# Altium PCB wrist_V3.PcbDoc
Units mm, origin at the board's own origin, x right, y up, seen from the top; angles counter-clockwise.
Board outline 79.47 x 23.4 mm, 2 copper layers (Top Layer, Bottom Layer); 47 components, 42 nets, 260 pads, 472 vias.
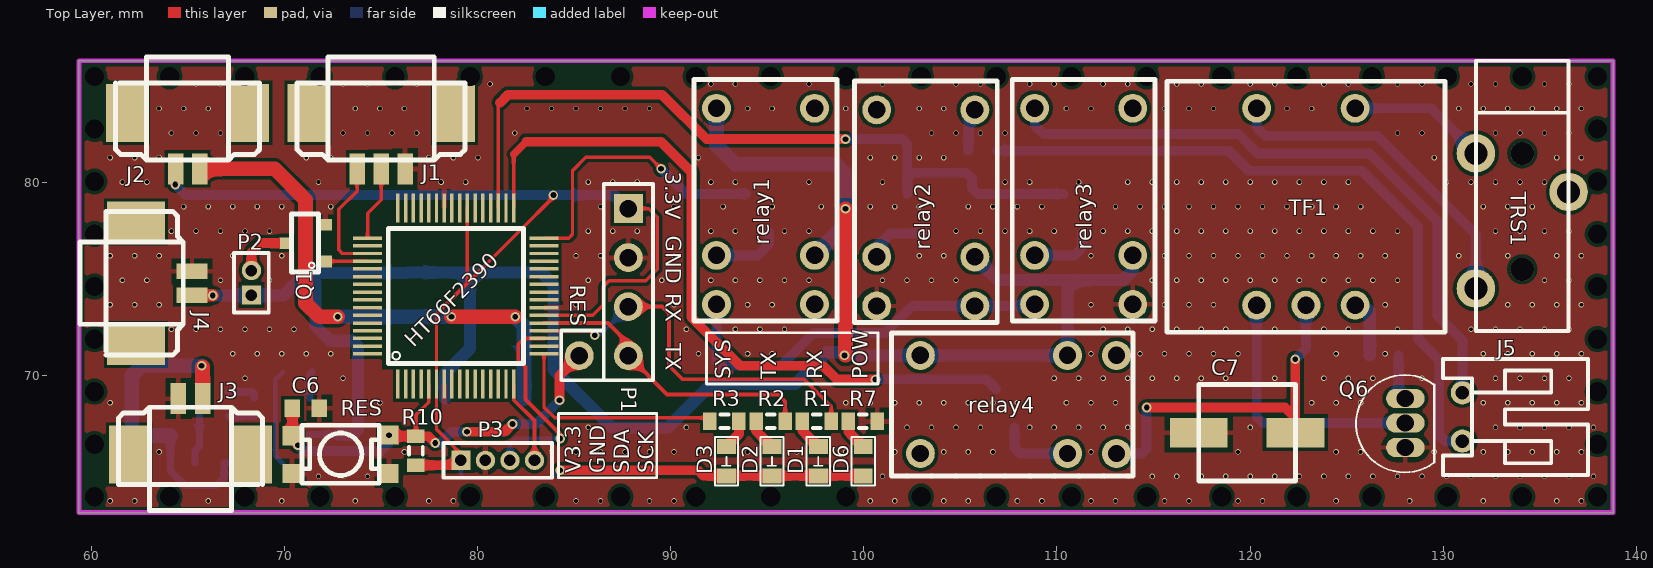
[diagram p0: Top Layer view]
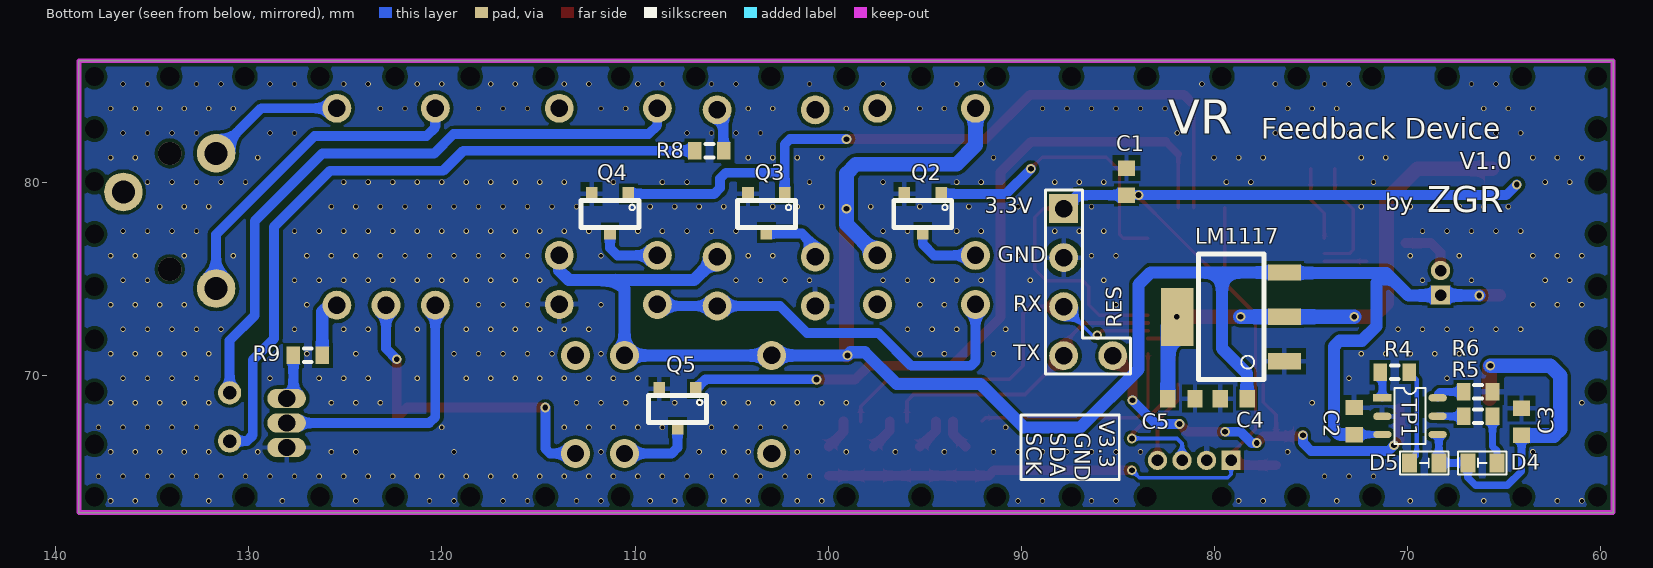
[diagram p1: Bottom Layer view, seen from below]

## Layer stack, top to bottom
Top Solder: solder mask 0.0102, Solder Resist, Dk 3.5
Top Layer: signal copper 0.0356
Dielectric 1: dielectric 0.32, FR-4, Dk 4.8
Bottom Layer: signal copper 0.0356
Bottom Solder: solder mask 0.0102, Solder Resist, Dk 3.5

## Board outline
59.34,62.892 138.81,62.892 138.81,86.295 59.34,86.295

## Design rules (kind name [scope] priority, off if disabled: settings)
Clearance [All] p1: gap=0.178 ignorepadtopadclearanceinfootprint=FALSE
ComponentClearance [All] p1: gap=0.254 collisioncheckmode=3 verticalgap=2540 showdistances=FALSE
PolygonConnect [All] p1: connectstyle=Relief reliefconductorwidth=0.254 reliefentries=4 polygonreliefangle="90 Angle" airgapwidth=0.254
RoutingVias [All] p1: holewidth=0.711 width=1.27 viastyle="Through Hole" minholewidth=0.2 minwidth=0.225 maxholewidth=1.2 maxwidth=1.27
SilkToSilkClearance [All] p1: silktosilkclearance=0.1
SolderMaskExpansion [All] p1: expansion=0.102
Width [All] p1: maxlimit=1.016 minlimit=0.178 preferedwidth=0.254 minimp=50.000000 maximp=50.000000 favimp=50.000000
28 further rules are at their usual default settings.

## Components (designator, comment, footprint, x,y, rotation, side; value= is the part's Value field where it differs from the comment)
C1 "Cap Semi" 1608[0603] 84.547,80.036 r270 bottom value=0.1uf
C2 "Cap Semi" 1608[0603] 72.747,67.636 r270 bottom value=1uf
C3 "Cap Semi" 1608[0603] 64.09,67.59 r270 bottom value=10uF
C4 "Cap Semi" 1608[0603] 79,68.8 r180 bottom value=10uf
C5 "Cap Semi" 1608[0603] 81.7,68.8 r0 bottom value=10uf
C6 "Cap Semi" 1608[0603] 71.1,68.3 r180 top value=0.1uf
C7 "22uf/25v" CAP_22UF_25V_5*5.4mm_SMD 122.347,64.536 r180 top
D1 "LED" SMD-0603_LED 97.64,64.8 r90 top
D2 "LED" SMD-0603_LED 95.24,64.8 r90 top
D3 "LED" SMD-0603_LED 92.88,64.8 r90 top
D4 "GREEN" SMD-0603_LED 66.87,65.465 r180 bottom
D5 "RED" SMD-0603_LED 68.372,65.465 r0 bottom
D6 "LED" SMD-0603 99.97,64.8 r90 top
HT66F2390 "HT66F2390_64" HLQFP-64(7mm*7mm) 75.865,69.543 r90 top (schematic designator HT66F2390_64_1)
J1 "Head_3" Terminal_block_3pin_1.25mm_SMD 74.4,83.6 r0 top
J2 "Head_2" Terminal_block_2pin_1.25mm_SMD 65,83.6 r0 top
J3 "Head_2" Terminal_block_2pin_1.25mm_SMD 65.1,65.9 r180 top
J4 "Head_2" Terminal_block_2pin_1.25mm_SMD 62.3,74.799 r90 top
J5 "JST_2P" JST_2P_S_2.5mm 137.5,70.85 r270 top
LM1117 "LM1117" SOT-223 80.818,69.783 r90 bottom
P1 "Header 4" HDR1X4 87.8,78.64 r270 top
P2 "MHDR1X2" MHDR1X2 68.28,75.43 r270 top
P3 "MHDR1X4" MHDR1X4 82.94,65.6 r180 top
Q1 "Transistor" SOT-23 70.1,76.85 r90 top
Q2 "Transistor" SOT-23 95.1,77.4 r0 bottom
Q3 "Transistor" SOT-23 103.2,77.4 r0 bottom
Q4 "Transistor" SOT-23 111.3,77.4 r0 bottom
Q5 "Transistor" SOT-23 107.8,67.3 r0 bottom
Q6 "C1815" TO-92A 128.047,68.806 r0 top
R1 "Res3" J1-0603 97.56,67.62 r0 top value=330
R2 "Res3" J1-0603 95.17,67.62 r0 top value=330
R3 "Res3" J1-0603 92.78,67.62 r180 top value=330
R4 "Res3" J1-0603 70.658,70.164 r0 bottom value=330
R5 "Res3" J1-0603 66.34,67.878 r180 bottom value=330
R6 "Res3" J1-0603 66.34,69.148 r0 bottom value=1.66K
R7 "Res3" J1-0603 99.95,67.62 r0 top value=330
R8 "Res3" J1-0603 106.147,81.636 r180 bottom value=0
R9 "Res3" J1-0603 126.947,71.036 r180 bottom value=33k
R10 "Res3" J1-0603 76.8,66.1 r90 top value=1K
relay1 "SY-05-K" SY-05-K 91.217,72.826 r90 top
relay2 "SY-05-K" SY-05-K 99.517,72.746 r90 top
relay3 "SY-05-K" SY-05-K 107.697,72.826 r90 top
relay4 "SY-05-K" SY-05-K 113.937,64.806 r180 top
RES "SW_Button" "TACK-SW_SMD 2P 4x3mm_2" 74.9,67.416 r270 top (schematic designator SB1)
TF1 "TF_CT" TF_14.4*13mm 115.697,72.236 r90 top
TP1 "" SOT-23-6 70.663,69.348 r180 bottom (schematic designator TP-4057)
TRS1 "TRS_3pin" PJ-320B_Dip 136.5,83.6 r270 top

## Footprints (in the part's own frame and the unit in brackets; to place one, negate y for a bottom-side part, rotate by r counter-clockwise, add the part's x,y. Pads: shape width x height; smd on the part's side, far side on the other; paste and mask are expansions set on the pad)
1608[0603] [mm] "Chip Capacitor, Body 1.6x0.8mm, IPC High Density"
  rect 0.8x0.9 smd: 1(-0.7,0) 2(0.7,0)
  body extent -0.87,-0.48 0.87,0.48, height 1.3
CAP_22UF_25V_5*5.4mm_SMD [mm]
  rect 3x1.524 smd: 1(0,-2.5) 2(5,-2.5)
  silkscreen extent 0,-5 5,0
HDR1X4 [mm] "Connector; Header; 4 Position"
  rect 1.5x1.5 hole 0.9: 1(0,0)
  round 1.5 hole 0.9: 2(2.54,0) 3(5.08,0) 4(7.62,0)
  silkscreen extent -1.27,-1.27 8.89,1.27
HLQFP-64(7mm*7mm) [mm] "HLQFP64(7mm*7mm)"
  rect 1.5x0.18 smd: 1(0,0) 2(0,-0.4) 3(0,-0.8) 4(0,-1.2) 5(0,-1.6) 6(0,-2) 7(0,-2.4) 8(0,-2.8) 9(0,-3.2) 10(0,-3.6) 11(0,-4) 12(0,-4.4) 13(0,-4.8) 14(0,-5.2) 15(0,-5.6) 16(0,-6) 33(9.13,-6) 34(9.13,-5.6) 35(9.13,-5.2) 36(9.13,-4.8) 37(9.13,-4.4) 38(9.13,-4) 39(9.13,-3.6) 40(9.13,-3.2) 41(9.13,-2.8) 42(9.13,-2.4) 43(9.13,-2) 44(9.13,-1.6) 45(9.13,-1.2) 46(9.13,-0.8) 47(9.13,-0.4) 48(9.13,0)
  rect 0.18x1.5 smd: 17(1.57,-7.57) 18(1.97,-7.57) 19(2.37,-7.57) 20(2.77,-7.57) 21(3.17,-7.57) 22(3.57,-7.57) 23(3.97,-7.57) 24(4.37,-7.57) 25(4.77,-7.57) 26(5.17,-7.57) 27(5.57,-7.57) 28(5.97,-7.57) 29(6.37,-7.57) 30(6.77,-7.57) 31(7.17,-7.57) 32(7.57,-7.57) 49(7.57,1.57) 50(7.17,1.57) 51(6.77,1.57) 52(6.37,1.57) 53(5.97,1.57) 54(5.57,1.57) 55(5.17,1.57) 56(4.77,1.57) 57(4.37,1.57) 58(3.97,1.57) 59(3.57,1.57) 60(3.17,1.57) 61(2.77,1.57) 62(2.37,1.57) 63(1.97,1.57) 64(1.57,1.57)
  silkscreen extent 1.07,-6.5 8.07,0.5
J1-0603 [mm] "Chip Resistor, Body 1.6x0.8mm, IPC High Density"
  rect 0.7x0.9 smd: 1(-0.75,0) 2(0.75,0)
  silkscreen extent -0.2,-0.35 0.2,0.35, body extent -0.85,-0.48 0.85,0.48, height 0.9
JST_2P_S_2.5mm [mm]
  round 1.2 hole 0.7: 1(1.75,-6.5) 2(4.25,-6.5)
  silkscreen extent 0,-7.5 6,0
MHDR1X2 [mm] "Connector; Header; 2 Position"
  round 1 hole 0.6: 1(0,0)
  rect 1x1 hole 0.6: 2(1.27,0)
  silkscreen extent -0.9,-0.9 2.17,0.9
MHDR1X4 [mm] "Connector; Header; 4 Position"
  round 1 hole 0.6: 1(0,0) 2(1.27,0) 3(2.54,0)
  rect 1x1 hole 0.6: 4(3.81,0)
  silkscreen extent -0.9,-0.9 4.71,0.9
PJ-320B_Dip [mm]
  round 2 hole 1.2: 1(2.1,-4.8) 2(9.1,-4.8) 3(4.1,0)
  silkscreen extent -2.7,-4.8 11.3,0
SMD-0603 [mm]
  rect 0.78x0.98 smd: 1(0,0) 2(1.51,0)
  silkscreen extent -0.5,-0.6 2,0.6
SMD-0603_LED [mm]
  rect 0.78x0.98 smd: 1(0,0) 2(1.51,0)
  silkscreen extent -0.5,-0.6 2,0.6
SOT-23 [mm]
  rect 0.6x0.7 smd: 1(-0.95,-2) 2(0,0) 3(0.95,-2)
  silkscreen extent -1.5,-1.65 1.5,-0.25
SOT-23-6 [mm]
  rect 0.95x0.38 smd: 1(-0.63,-0.51)
  oval 0.95x0.38 smd: 2(-0.63,-1.47) 3(-0.63,-2.41) 4(2.23,-2.41) 5(2.227,-1.461) 6(2.23,-0.51)
  silkscreen extent 0,-2.91 1.61,0
SOT-223 [mm]
  rect 0.84x1.7 smd: 1(0.95,-4.45) 2(3.25,-4.45) 3(5.55,-4.45)
  rect 3x1.7 smd: 2(3.25,1.1)
  silkscreen extent 0,-3.4 6.5,0
SY-05-K [mm]
  round 1.5 hole 0.9: 1(0.85,-6.23) 2(3.39,-6.23) 5(11.01,-6.23) 6(11.01,-1.15) 9(3.39,-1.15) 10(0.85,-1.15)
  silkscreen extent 0,-7.39 12.5,0.01
"TACK-SW_SMD 2P 4x3mm_2" [mm]
  rect 1x1 smd: 1(0.5,0.5) 1(0.55,-4.5) 2(2.5,0.5) 2(2.5,-4.5)
  silkscreen extent 0,-4 3,0
Terminal_block_2pin_1.25mm_SMD [mm]
  rect 0.8x1.6 smd: 1(-0.65,-2.9) 2(0.6,-2.9)
  rect 2.1x3 smd: ""(-3.2,0) ""(3.15,0)
  silkscreen extent -3.75,-2.45 3.7,2.9
Terminal_block_3pin_1.25mm_SMD [mm]
  rect 0.8x1.6 smd: 1(-0.65,-2.9) 2(0.6,-2.9) 3(1.85,-2.9)
  rect 2.1x3 smd: ""(-3.2,0) ""(4.4,0)
  silkscreen extent -3.75,-2.45 4.95,2.9
TF_14.4*13mm [mm]
  round 1.5 hole 0.9: 1(1.4,-4.65) 2(1.4,-7.2) 3(1.4,-9.75) 4(11.6,-4.65) 5(11.6,-9.75)
  silkscreen extent 0,-14.4 13,0
TO-92A [mm]
  oval 2x1 hole 0.9: 1(0,0) 2(0,-1.27) 3(0,-2.54)
  silkscreen extent -2.55,-3.83 1.5,1.22

## Part data
C1 C2 C3 C4 C5 C6: "Capacitor (Semiconductor SIM Model)", LatestRevisionDate=29-May-2009, LatestRevisionNote="IPC-7351 Footprint Added.", PackageDescription="Chip Capacitor", PackageReference=C1206, Published=8-Jun-2000, Publisher="Altium Limited"
C7: library part Cap
D4 D5: library part LED
P1 P3: "Header, 4-Pin", LatestRevisionDate=17-Jul-2002, LatestRevisionNote="Re-released for DXP Platform.", Publisher="Altium Limited"
P2: "Header, 2-Pin", LatestRevisionDate=17-Jul-2002, LatestRevisionNote="Re-released for DXP Platform.", Publisher="Altium Limited"
Q6: library part Transistor
R1 R2 R3 R4 R5 R6 R7 R8 R9 R10: "Resistor", LatestRevisionDate=29-May-2009, LatestRevisionNote="IPC-7351 Footprint Added.", PackageDescription="Chip Resistor", PackageReference=J1-0603, Published=8-Jun-2000, Publisher="Altium Limited"
TF1: library part Trans_CT
TP1: library part TP-4057

## Free pads (board coordinates)
  round 0 hole 1: 0(60.15,63.72) 0(60.15,66.44) 0(60.15,69.16) 0(60.15,71.88) 0(60.15,74.6) 0(60.15,77.32) 0(60.15,80.04) 0(60.15,82.76) 0(60.15,85.48) 0(64.042,63.72) 0(64.042,85.48) 0(67.935,63.72) 0(67.935,85.48) 0(71.827,63.72) 0(71.827,85.48) 0(75.72,63.72) 0(75.72,85.48) 0(79.612,63.72) 0(79.612,85.48) 0(83.505,63.72) 0(83.505,85.48) 0(87.397,63.72) 0(87.397,85.48) 0(91.29,63.72) 0(91.29,85.48) 0(95.182,63.72) 0(95.182,85.48) 0(99.075,63.72) 0(99.075,85.48) 0(102.967,63.72) 0(102.967,85.48) 0(106.86,63.72) 0(106.86,85.48) 0(110.752,63.72) 0(110.752,85.48) 0(114.645,63.72) 0(114.645,85.48) 0(118.537,63.72) 0(118.537,85.48) 0(122.43,63.72) 0(122.43,85.48) 0(126.322,63.72) 0(126.322,85.48) 0(130.215,63.72) 0(130.215,85.48) 0(134.107,63.72) 0(134.107,85.48) 0(138,63.72) 0(138,85.48) 0(138,66.44) 0(138,69.16) 0(138,71.88) 0(138,74.6) 0(138,77.32) 0(138,80.04) 0(138,82.76)
  round 1.5 hole 0.9: ""(85.26,71.02)

## Via types
v1: diameter 0.275, hole 0.2, Top Layer to Bottom Layer, tented both sides, 447 vias
v2: diameter 0.5, hole 0.3, Top Layer to Bottom Layer, tented both sides, 23 vias
v3: diameter 1.2, hole 1.2, Top Layer to Bottom Layer, 2 vias

## Nets (pads, with @x,y where several pads share a name; then routed paths per layer and width w, separated by ;. In a path a pad name is that pad's centre, name@x,y a point inside that pad or via, vN(x,y) a via of type N, cw(c..) or ccw(c..) an arc to the next point about the centre after c; other vN are vias at no path point)
3.3V: C5.2 J2.2 LM1117.2 | length 27.1
  Top Layer w0.762: J2.2 69.48,80.7 71.08,79.1 71.08,73.74 71.787,73.033 v2(72.747,73.033) ; v2(78.637,73.033) v2(81.943,73.033)
  Bottom Layer w0.762: v2(72.747,73.033) 76.368,73.033 v2(78.637,73.033) ; LM1117.2@81.918,73.033 82.4,72.551 C5.2
ESP_EN: HT66F2390.18
ESP_RX: HT66F2390.21 P1.4 R2.2 | length 15.6
  Top Layer w0.203: HT66F2390.21 86.747,72.713 87.8,71.66 P1.4 89.811,69.009 95.571,69.009 95.92,68.66 R2.2
ESP_TX: HT66F2390.20 P1.3 R1.2 | length 20.1
  Top Layer w0.203: HT66F2390.20 85.827,72.313 v2(86.06,72.08) ; P1.3 89.547,73.56 89.9,73.207 89.9,70.5 90.6,69.8 96.89,69.8 98.31,68.38 R1.2
  Bottom Layer w0.203: v2(86.06,72.08) 86.32,72.08 P1.3
GND: C1.1 C2.1 C3.1 C4.1 C5.1 C6.1 C7.2 HT66F2390.7 HT66F2390.23 HT66F2390.42 J1.3 J3.2 J4.2 LM1117.1 P1.2 P3.3 Q1.3 Q2.3 Q3.3 Q4.3 Q5.3 Q6.3 R6.1 R7.2 relay2.10 relay3.1 RES.2 TP1.2
  other v1: 60.96,63.5 62.23,63.5 66.04,63.5 69.85,63.5 73.66,63.5 77.47,63.5 78.74,63.5 85.09,63.5 86.36,63.5 88.9,63.5 90.17,63.5 100.33,63.5 101.6,63.5 104.14,63.5 105.41,63.5 107.95,63.5 109.22,63.5 111.76,63.5 113.03,63.5 115.57,63.5 116.84,63.5 119.38,63.5 120.65,63.5 124.46,63.5 128.27,63.5 132.08,63.5 135.89,63.5 137.16,63.5 71.755,64.77 73.025,64.77 74.295,64.77 100.965,64.77 102.235,64.77 103.505,64.77 104.775,64.77 106.045,64.77 107.315,64.77 108.585,64.77 109.855,64.77 111.125,64.77 112.395,64.77 113.665,64.77 114.935,64.77 116.205,64.77 117.475,64.77 118.745,64.77 120.015,64.77 121.285,64.77 122.555,64.77 123.825,64.77 125.095,64.77 126.365,64.77 127.635,64.77 128.905,64.77 130.175,64.77 131.445,64.77 132.715,64.77 133.985,64.77 135.255,64.77 136.525,64.77 137.795,64.77 63.5,66.04 76.2,66.04 83.82,66.04 85.09,66.04 86.36,66.04 87.63,66.04 88.9,66.04 90.17,66.04 91.44,66.04 93.98,66.04 96.52,66.04 99.06,66.04 101.6,66.04 104.14,66.04 105.41,66.04 106.68,66.04 111.76,66.04 119.38,66.04 124.46,66.04 125.73,66.04 129.54,66.04 132.08,66.04 133.35,66.04 134.62,66.04 135.89,66.04 137.16,66.04 85.725,67.31 90.805,67.31 102.235,67.31 103.505,67.31 104.775,67.31 106.045,67.31 108.585,67.31 109.855,67.31 111.125,67.31 112.395,67.31 113.665,67.31 120.015,67.31 132.715,67.31 133.985,67.31 135.255,67.31 136.525,67.31 137.795,67.31 60.96,68.58 74.93,68.58 99.06,68.58 100.33,68.58 101.6,68.58 102.87,68.58 104.14,68.58 105.41,68.58 106.68,68.58 107.95,68.58 110.49,68.58 111.76,68.58 113.03,68.58 123.19,68.58 124.46,68.58 125.73,68.58 132.08,68.58 133.35,68.58 134.62,68.58 135.89,68.58 137.16,68.58 67.945,69.85 73.025,69.85 109.855,69.85 111.125,69.85 112.395,69.85 113.665,69.85 114.935,69.85 116.205,69.85 117.475,69.85 118.745,69.85 121.285,69.85 123.825,69.85 125.095,69.85 126.365,69.85 128.905,69.85 132.715,69.85 133.985,69.85 135.255,69.85 136.525,69.85 67.31,71.12 68.58,71.12 69.85,71.12 71.12,71.12 72.39,71.12 91.44,71.12 93.98,71.12 95.25,71.12 111.76,71.12 114.3,71.12 115.57,71.12 116.84,71.12 118.11,71.12 119.38,71.12 124.46,71.12 127,71.12 132.08,71.12 133.35,71.12 134.62,71.12 135.89,71.12 137.16,71.12 64.135,72.39 65.405,72.39 66.675,72.39 67.945,72.39 69.215,72.39 70.485,72.39 90.805,72.39 93.345,72.39 94.615,72.39 95.885,72.39 112.395,72.39 113.665,72.39 114.935,72.39 116.205,72.39 117.475,72.39 118.745,72.39 121.285,72.39 123.825,72.39 125.095,72.39 127.635,72.39 131.445,72.39 132.715,72.39 133.985,72.39 135.255,72.39 136.525,72.39 60.96,73.66 62.23,73.66 63.5,73.66 85.09,73.66 90.17,73.66 93.98,73.66 95.25,73.66 111.76,73.66 115.57,73.66 116.84,73.66 118.11,73.66 127,73.66 133.35,73.66 134.62,73.66 135.89,73.66 137.16,73.66 61.595,74.93 62.865,74.93 66.675,74.93 69.215,74.93 85.725,74.93 89.535,74.93 92.075,74.93 93.345,74.93 94.615,74.93 95.885,74.93 97.155,74.93 100.965,74.93 102.235,74.93 103.505,74.93 104.775,74.93 114.935,74.93 116.205,74.93 117.475,74.93 118.745,74.93 120.015,74.93 121.285,74.93 122.555,74.93 123.825,74.93 125.095,74.93 126.365,74.93 127.635,74.93 135.255,74.93 136.525,74.93 60.96,76.2 62.23,76.2 63.5,76.2 67.31,76.2 69.85,76.2 85.09,76.2 86.36,76.2 90.17,76.2 102.87,76.2 104.14,76.2 111.76,76.2 115.57,76.2 116.84,76.2 118.11,76.2 119.38,76.2 120.65,76.2 121.92,76.2 123.19,76.2 124.46,76.2 125.73,76.2 127,76.2 130.81,76.2 133.35,76.2 135.89,76.2 137.16,76.2 64.135,77.47 65.405,77.47 66.675,77.47 67.945,77.47 69.215,77.47 85.725,77.47 86.995,77.47 88.265,77.47 92.075,77.47 93.345,77.47 95.885,77.47 97.155,77.47 104.775,77.47 106.045,77.47 107.315,77.47 108.585,77.47 109.855,77.47 112.395,77.47 113.665,77.47 114.935,77.47 116.205,77.47 117.475,77.47 118.745,77.47 120.015,77.47 121.285,77.47 122.555,77.47 123.825,77.47 125.095,77.47 126.365,77.47 127.635,77.47 132.715,77.47 133.985,77.47 135.255,77.47 136.525,77.47 64.77,78.74 66.04,78.74 67.31,78.74 68.58,78.74 69.85,78.74 72.39,78.74 86.36,78.74 90.17,78.74 92.71,78.74 95.25,78.74 97.79,78.74 100.33,78.74 101.6,78.74 102.87,78.74 105.41,78.74 106.68,78.74 107.95,78.74 109.22,78.74 113.03,78.74 114.3,78.74 115.57,78.74 116.84,78.74 118.11,78.74 119.38,78.74 120.65,78.74 121.92,78.74 123.19,78.74 124.46,78.74 125.73,78.74 132.08,78.74 133.35,78.74 134.62,78.74 61.595,80.01 62.865,80.01 71.755,80.01 78.105,80.01 79.375,80.01 85.725,80.01 86.995,80.01 88.265,80.01 92.075,80.01 93.345,80.01 97.155,80.01 100.965,80.01 107.315,80.01 108.585,80.01 111.125,80.01 113.665,80.01 114.935,80.01 116.205,80.01 117.475,80.01 118.745,80.01 120.015,80.01 121.285,80.01 122.555,80.01 123.825,80.01 125.095,80.01 130.175,80.01 131.445,80.01 132.715,80.01 133.985,80.01 135.255,80.01 60.96,81.28 62.23,81.28 63.5,81.28 71.12,81.28 72.39,81.28 77.47,81.28 78.74,81.28 80.01,81.28 91.44,81.28 100.33,81.28 101.6,81.28 102.87,81.28 104.14,81.28 129.54,81.28 135.89,81.28 137.16,81.28 64.135,82.55 65.405,82.55 66.675,82.55 73.025,82.55 74.295,82.55 75.565,82.55 76.835,82.55 81.915,82.55 103.505,82.55 104.775,82.55 106.045,82.55 107.315,82.55 127.635,82.55 128.905,82.55 132.715,82.55 133.985,82.55 135.255,82.55 136.525,82.55 63.5,83.82 64.77,83.82 66.04,83.82 73.66,83.82 74.93,83.82 76.2,83.82 82.55,83.82 83.82,83.82 85.09,83.82 86.36,83.82 87.63,83.82 88.9,83.82 93.98,83.82 95.25,83.82 99.06,83.82 102.87,83.82 104.14,83.82 110.49,83.82 111.76,83.82 115.57,83.82 116.84,83.82 118.11,83.82 121.92,83.82 123.19,83.82 130.81,83.82 132.08,83.82 133.35,83.82 134.62,83.82 135.89,83.82 137.16,83.82 65.405,85.09 66.675,85.09 73.025,85.09 74.295,85.09 76.835,85.09 80.645,85.09 92.075,85.09 93.345,85.09 97.155,85.09 100.965,85.09 104.775,85.09 106.045,85.09 108.585,85.09 109.855,85.09 112.395,85.09 113.665,85.09 116.205,85.09 117.475,85.09 120.015,85.09 121.285,85.09 123.825,85.09 125.095,85.09 127.635,85.09 128.905,85.09 131.445,85.09 132.715,85.09 135.255,85.09 136.525,85.09
LED1: HT66F2390.49 J1.2 | length 3.9
  Top Layer w0.178: HT66F2390.49 74.295,78.395 75,79.1 J1.2
LED2: HT66F2390.51 J1.1 | length 6.2
  Top Layer w0.178: J1.1 73.75,79.55 72.8,78.6 72.8,76.5 72.987,76.313 HT66F2390.51
LED_SYS: HT66F2390.17 R3.2 | length 11.7
  Top Layer w0.178: HT66F2390.17 83.435,68.355 83.99,67.8 91.85,67.8 R3.2
NetC7_1: C7.1 relay4.10 TF1.2 | length 17.8
  Top Layer w0.508: v2(114.647,68.336) 121.811,68.336 122.347,67.8 v2(122.347,70.836)
  Bottom Layer w0.508: relay4.10 114.403,65.956 114.647,66.2 v2(114.647,68.336) ; v2(122.347,70.836) 122.897,71.386 TF1.2
NetD1_2: D1.2 R1.1 | length 1.7
  Top Layer w0.508: R1.1 96.81,67.14 D1.2
NetD2_2: D2.2 R2.1 | length 1.6
  Top Layer w0.508: R2.1 94.42,67.13 D2.2
NetD3_2: D3.2 R3.1 | length 1.6
  Top Layer w0.508: D3.2 93.53,66.96 R3.1
NetD4_2: D4.2 R5.2 | length 2.5
  Bottom Layer w0.381: D4.2 65.36,66.09 65.59,66.32 R5.2
NetD5_2: D5.2 R4.1 | length 5
  Bottom Layer w0.254: D5.2 69.515,65.832 69.515,69.771 R4.1
NetD6_2: D6.2 R7.1 | length 1.6
  Top Layer w0.508: R7.1 99.2,67.08 D6.2
NetJ5_1: J5.1 relay3.6 | length 33.2
  Bottom Layer w0.508: relay3.6 108.847,82.953 109.3,82.5 119.4,82.5 120.4,81.5 126.2,81.5 129.7,78 129.7,73.1 131,71.8 J5.1
NetJ5_2: J5.2 R8.1 | length 36
  Bottom Layer w0.508: R8.1 118.9,81.636 119.936,80.6 125.8,80.6 128.7,77.7 128.7,71.9 129.8,70.8 129.8,66.9 130.1,66.6 J5.2
NetP2_1: P2.1 Q1.2 | length 3
  Top Layer w0.508: P2.1 68.28,76.36 68.77,76.85 Q1.2
NetQ2_1: Q2.2 relay1.9 | length 3.6
  Bottom Layer w0.508: relay1.9 94.516,76.216 95.1,76.8 Q2.2
  Bottom Layer w0.762: relay1.9 relay1.9@92.397,76.246
NetQ3_1: Q3.2 relay2.9 | length 3.4
  Bottom Layer w0.508: relay2.9 100.667,76.667 101.356,77.356 103.156,77.356 Q3.2
NetQ4_1: Q4.2 relay3.9 | length 3.4
  Bottom Layer w0.508: relay3.9 110.916,76.216 111.3,76.6 Q4.2
NetQ5_1: Q5.2 relay4.9 | length 3.9
  Bottom Layer w0.508: Q5.2 107.8,66.256 108.1,65.956 relay4.9
NetQ6_1: Q6.2 TF1.1 | length 13.6
  Bottom Layer w0.508: TF1.1 120.347,67.853 120.664,67.536 Q6.2
NetQ6_2: Q6.1 R9.1 | length 2.4
  Bottom Layer w0.508: R9.1 127.697,69.156 Q6.1
NetR4_2: R4.2 TP1.1 | length 1.4
  Bottom Layer w0.381: TP1.1 71.293,70.049 R4.2
NetR5_1: R5.1 TP1.5 | length 1.3
  Bottom Layer w0.381: R5.1 68.427,67.878 TP1.5
NetR6_2: R6.2 TP1.6 | length 1.6
  Bottom Layer w0.381: R6.2 68.335,69.148 68.433,69.05 TP1.6
NetR8_2: R8.2 relay2.5 | length 2.2
  Bottom Layer w0.508: R8.2 105.427,81.666 relay2.5@105.427,83.836
NetR9_2: R9.2 TF1.3 | length 3.2
  Bottom Layer w0.635: TF1.3 125.864,73.636 126.197,73.303 R9.2
Netrelay1_10: relay1.10 relay2.1 relay3.10 | length 20.8
  Bottom Layer w0.508: relay1.10 92.367,70.733 92.6,70.5 95.7,70.5 97.4,72.2 101.1,72.2 102.496,73.596 relay2.1 108.767,73.596 relay3.10
NetTF1_4: TF1.4 TRS1.2 | length 17.4
  Bottom Layer w0.508: TF1.4 120.347,82.853 120.8,82.4 126.6,82.4 131.7,77.3 TRS1.2
NetTF1_5: TF1.5 TRS1.1 | length 7.2
  Bottom Layer w0.508: TF1.5 129.364,83.836 TRS1.1
RES: C6.2 HT66F2390.5 pad. R10.2 RES.1 | length 23.1
  Top Layer w0.178: 76.8,67.95 77.465,68.615 HT66F2390.5
  Top Layer w0.203: R10.2 76.8,67.95
  Top Layer w0.508: C6.2 70.4,66.866 70.4,66.67 v2(70.69,66.38) ; RES.1@75.4,66.916 75.466,66.85 R10.2 77.46,66.85 77.46,66.84 v2(77.8,66.5) ; v2(79.44,67.08) 81.4,67.08 v2(81.8,67.48) ; v2(84.24,68.71) 84.24,70 pad.
  Bottom Layer w0.508: v2(70.69,66.38) 70.98,66.09 74.99,66.09 75.41,66.51 v2(75.41,66.9) ; v2(77.8,66.5) 78.06,66.5 78.64,67.08 v2(79.44,67.08) ; v2(81.8,67.48) 83.01,67.48 v2(84.24,68.71)
SCK_Burn: HT66F2390.16 P3.1 | length 4.4
  Top Layer w0.203: HT66F2390.16 81.865,68.735 82.94,67.66 P3.1
SDA_Burn: HT66F2390.19 P3.2 | length 10.8
  Top Layer w0.203: HT66F2390.19 82.413,71.913 82.1,71.6 82.1,70.8 82.47,70.43 82.47,68.76 84.267,66.963 v2(84.267,66.735)
  Bottom Layer w0.203: P3.2 81.67,66.47 81.935,66.735 v2(84.267,66.735)
shock: HT66F2390.52 Q1.1 | length 2.2
  Top Layer w0.178: Q1.1 72.113,75.913 HT66F2390.52
TCM1: HT66F2390.32 Q2.1 | length 14.9
  Top Layer w0.178: HT66F2390.32 84.723,77.113 84.91,77.3 84.91,80.61 85.6,81.3 88.9,81.3 v2(89.5,80.7)
  Bottom Layer w0.508: v2(89.5,80.7) 90.8,79.4 Q2.1@93.897,79.4
TCM2: HT66F2390.35 Q3.1 Q4.1 | length 39.4
  Top Layer w0.178: HT66F2390.35 81.065,84.036 81.147,84.118
  Top Layer w0.508: 81.147,84.118 81.565,84.536 89.547,84.536 91.847,82.236 v2(99.047,82.236)
  Bottom Layer w0.508: v2(99.047,82.236) 101.98,82.236 102.25,81.966 102.25,80.2 ; Q3.1 102.25,80.2 ; Q4.1 105.9,79.4 105.6,79.7 105.6,80.2 105.3,80.5 102.55,80.5 102.25,80.2
TF: HT66F2390.33 Q5.1 | length 37.7
  Top Layer w0.178: HT66F2390.33 81.865,81.455
  Top Layer w0.381: 81.865,81.455 82.51,82.1
  Top Layer w0.508: 82.51,82.1 89.5,82.1 91.077,80.523 91.077,73.009 93.586,70.5 97.883,70.5 98.6,69.783 v2(100.6,69.783)
  Bottom Layer w0.508: v2@100.6,69.798 106.352,69.798 Q5.1
USB5V: C3.2 D4.1 D5.1 J3.1 TP1.4 | length 19.2
  Top Layer w0.762: J3.1 v2@65.75,70.45
  Bottom Layer w0.381: C3.2 64.09,65.04 64.82,64.31 66.47,64.31 66.87,64.71 D4.1 D5.1 68.372,66.877 TP1.4
  Bottom Layer w0.762: C3.2 62.41,66.89 62.08,67.22 62.08,69.98 62.6,70.5 v2(65.7,70.5)
VCC: C2.2 C4.2 J4.1 LM1117.3 P2.2 relay1.2 relay1.6 relay2.2 relay3.2 relay4.2 relay4.5 TP1.3 | length 108.6
  Top Layer w0.635: J4.1 66.271,74.149 v2(66.28,74.14)
  Top Layer w0.762: v2@99.047,71.036 v2(99.047,78.636)
  Bottom Layer w0.381: TP1.3 72.745,66.938 C2.2
  Bottom Layer w0.508: v2(99.047,78.636) v2@99.147,78.636
  Bottom Layer w0.635: v2(66.28,74.14) 69.94,74.14 71.1,75.3 ; C2.2 73.536,66.936 73.8,67.2 73.8,71.5 73.5,71.8 72.349,71.8 71.6,72.549 71.6,74.8 71.1,75.3 ; C4.2 78.3,70.1 79.6,71.4 79.6,75.333 ; relay2.2 106.947,74.936 111,74.936 ; relay3.2 113.927,75.434 113.429,74.936 111,74.936 ; 71.1,75.3 76.335,75.3 LM1117.3 79.6,75.333 ; 79.6,75.333 83.297,75.333 83.93,74.7 83.93,70.31 86.94,67.3 89.862,67.3 92.112,69.55 96.45,69.55 98.1,71.2 98.836,71.2 v2(99,71.036) relay4.5 relay4.2 110.547,74.483 111,74.936
  Bottom Layer w0.762: relay1.6 92.367,81.916 93.347,80.936 98.564,80.936 99.047,80.453 v2(99.047,78.636) 99.047,77.816 relay1.2
VDD: C1.2 D1.1 D2.1 D3.1 D6.1 HT66F2390.6 HT66F2390.22 HT66F2390.39 J2.1 P1.1 P3.4 R10.1 | length 81.1
  Top Layer w0.178: P3.4 79.13,65.94 77.865,67.205 HT66F2390.6 77.865,73.18 83.104,78.419 ; 79.465,74.8 HT66F2390.39 ; HT66F2390.22 85.953,73.113 86.5,73.66 86.5,74.6 86.8,74.9 88.7,74.9 89.3,75.5 89.3,78.2 88.86,78.64 P1.1
  Top Layer w0.203: 83.104,78.419 83.92,79.235 v2(83.92,79.336)
  Top Layer w0.508: R10.1 78.88,65.35 P3.4 ; v2(84.267,65.09) 91.4,65.09 91.69,64.8 D3.1 D2.1 D1.1 D6.1
  Bottom Layer w0.178: P3.4 79.13,64.87 79.3,64.7 83.877,64.7 v2(84.267,65.09)
  Bottom Layer w0.508: v2(64.33,79.88) 64.874,79.336 v2(83.92,79.336) C1.2 87.104,79.336 P1.1
  Bottom Layer w0.762: P1.1@87.579,78.419 P1.1
pads on no net: HT66F2390.1 HT66F2390.2 HT66F2390.3 HT66F2390.4 HT66F2390.8 HT66F2390.9 HT66F2390.10 HT66F2390.11 HT66F2390.12 HT66F2390.13 HT66F2390.14 HT66F2390.15 HT66F2390.24 HT66F2390.25 HT66F2390.26 HT66F2390.27 HT66F2390.28 HT66F2390.29 HT66F2390.30 HT66F2390.31 HT66F2390.34 HT66F2390.36 HT66F2390.37 HT66F2390.38 HT66F2390.40 HT66F2390.41 HT66F2390.43 HT66F2390.44 HT66F2390.45 HT66F2390.46 HT66F2390.47 HT66F2390.48 HT66F2390.50 HT66F2390.53 HT66F2390.54 HT66F2390.55 HT66F2390.56 HT66F2390.57 HT66F2390.58 HT66F2390.59 HT66F2390.60 HT66F2390.61 HT66F2390.62 HT66F2390.63 HT66F2390.64 J1. J2. J3. J4. relay1.1 relay1.5 relay2.6 relay3.5 relay4.1 relay4.6 TRS1.3
copper on no net:
  other v3: 134.1,75.5 134.1,81.5

## Polygon pours and split planes (outlines as drawn)
GND on Bottom Layer "GND_L02_P046" (solid, remove dead copper, pour order 46): 138.81,86.295 59.34,86.295 59.34,62.892 138.81,62.892
GND on Bottom Layer "GND_L02_P044" (solid, remove dead copper, pour order 44): 132.87,88.18
GND on Top Layer "GND_L01_P048" (solid, remove dead copper, pour order 48): 138.81,86.295 138.81,62.892 59.34,62.892 59.34,86.295

## Keep-outs
Keep-Out Layer:
  the board outline again, w0.254

## Other copper
Top Layer:
  pour cut-out: 75.06,77.94 82.69,77.94 82.68,77.93 82.68,70.29 75.04,70.29

## Silkscreen, mask and mechanical layers (free items; w line width, h text height)
Top Overlay:
  lines w0.15: 84.19,64.7 89.275,64.7 89.275,68.033 84.19,68.033 84.19,64.7 ; 91.85,69.56 91.85,72.208 94.072,72.208 100.74,72.208 100.74,69.56 91.85,69.56
  lines w0.2: 86.52,72.33 84.33,72.33 84.33,69.75 86.53,69.75
  text "3.3V" at 89.72,80.56 h0.8 r270
  text "GND" at 89.73,77.23 h0.8 r270
  text "RES" at 84.79,74.7 h0.8 r270
  text "RX" at 89.73,74.25 h0.8 r270
  text "TX" at 89.73,71.67 h0.8 r270
  text "SYS" at 93.11,69.81 h0.8 r90
  text "TX" at 95.473,69.81 h0.8 r90
  text "RX" at 97.837,69.81 h0.8 r90
  text "POW" at 100.2,69.81 h0.8 r90
  text "V3.3" at 85.34,64.94 h0.8 r90
  text "GND" at 86.597,64.94 h0.8 r90
  text "SDA" at 87.853,64.94 h0.8 r90
  text "SCK" at 89.11,64.94 h0.8 r90
Bottom Overlay:
  lines w0.15: 84.34,70.07 84.34,71.93 86.83,71.93 86.83,79.61 88.75,79.61 88.75,70.07 84.34,70.07 ; 84.92,64.61 84.92,67.943 90.005,67.943 90.005,64.61 84.92,64.61
  text "VR" at 82.38,81.93 h3
  text "Feedback Device" at 77.56,81.89 h1.8
  text "V1.0" at 67.294,80.37 h1.5
  text "3.3V" at 91.886,78.4 h0.8
  text "by" at 71.138,78.251 h1.5
  text "ZGR" at 68.979,77.997 h2.3
  text "GND" at 91.22,75.86 h0.8
  text "RX" at 90.42,73.32 h0.8
  text "RES" at 84.78,72.47 h0.8 r270
  text "TX" at 90.42,70.78 h0.8
  text "V3.3" at 85.97,67.686 h0.8 r90
  text "GND" at 87.227,67.02 h0.8 r90
  text "SDA" at 88.483,67.02 h0.8 r90
  text "SCK" at 89.74,67.02 h0.8 r90